# EAGLE board HPLEDShield-v32 (EAGLE 5.11)
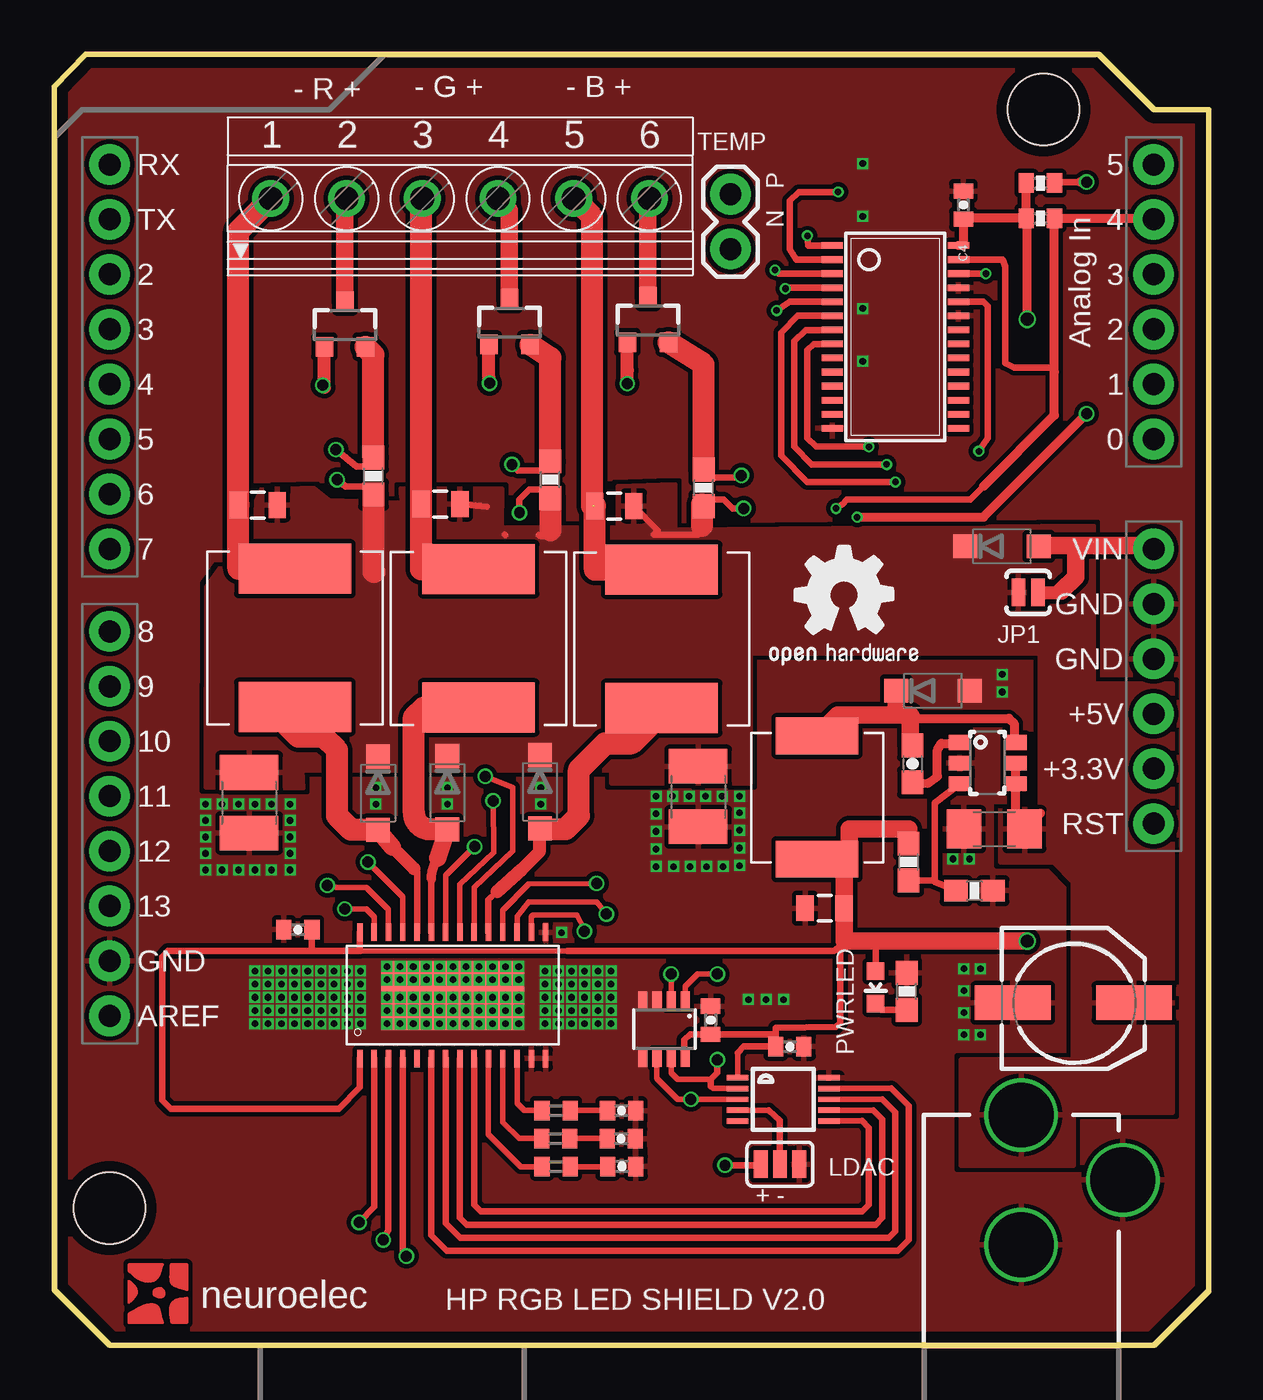
[diagram p0: board, top side]
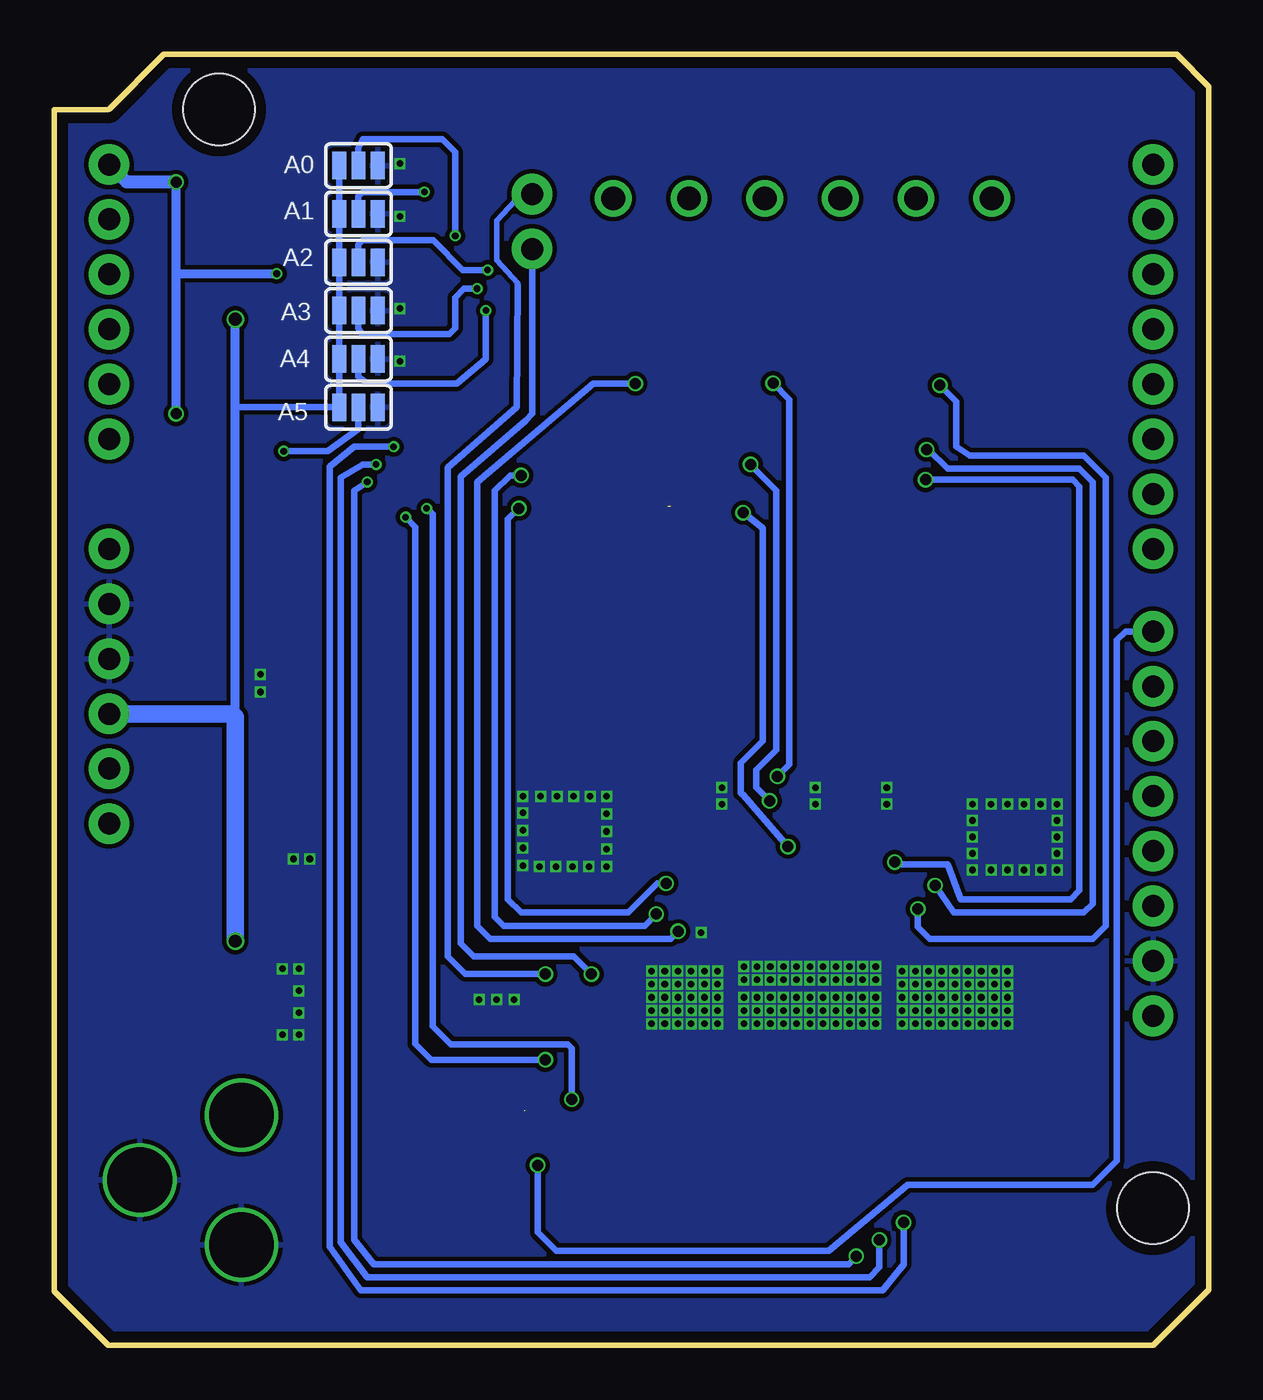
[diagram p1: board, bottom side, seen from below]

Size 53.37 x 59.72 mm. Coordinates in mm from the lower left corner, seen from the top.
Outline: 50.9,57.15 53.37,57.15 53.37,2.52 50.85,0 2.57,0 0,2.56 0,58.22 1.47,59.71 48.29,59.71 50.83,57.17
Copper layers (1*16): Top 0.035mm / dielectric 1.5mm / Bottom 0.035mm
Design rules "PCBCart-.3mmHoles-.1mmAnnulars": minimum track width 8mil, minimum drill 0.3mm, track to track 8mil, track to pad 8mil, pad to pad 8mil, via to via 8mil, smd to smd 8mil, copper to edge 20mil, drill to drill 8mil, minimum pad ring 8mil, minimum via ring 4mil, stop-mask expansion 3mil, vias tented up to drill 0mil, thermal gap 8mil

## Footprints (pad centres in the part's own frame; a part is rotated, then mirrored left to right if it is on the bottom)
SJ_3 = smd 0.635 x 1.27: 1 -0.889,0; 2 0,0; 3 0.889,0
0805 = smd 0.8 x 1.2: 1 -0.9,0; 2 0.9,0
0402-CAP = smd 0.7 x 0.9: 1 -0.65,0; 2 0.65,0
C1210 = smd 1.6 x 2.7: 1 -1.4,0; 2 1.4,0
NICHICON_63 = smd 3.5 x 1.6: + 2.8,-0.2; - -2.8,-0.2
0603-CAP = smd 1.1 x 1: 1 -0.85,0; 2 0.85,0
1206 = smd 1.6 x 1.8: 1 -1.4,0; 2 1.4,0
SOD123 = smd 1.1 x 1.1: 1 -1.7,0; 2 1.7,0
POWER_JACK_PTH = drill 2.997 round: GND 0,7.7; GNDBREAK 4.7,10.7; PWR 0,13.7
SJ_2S-NO = smd 0.635 x 1.27: 1 -0.45,0; 2 0.45,0
LQH88P = smd 2.3 x 5.2: P$1 -3.21,0; P$2 3.19,0
ELL6UH = smd 1.7 x 3.8: P$1 -2.86,0; P$2 2.84,0
LED-0603 = smd 0.8 x 0.8: A 0,-0.75; C 0,0.75
SSOP28_LED = smd 0.8 x 0.25: 1 -2.921,4.298; 2 -2.921,3.637; 3 -2.921,2.977; 4 -2.921,2.317; 5 -2.921,1.656; 6 -2.921,0.996; 7 -2.921,0.335; 8 -2.927,-0.325; 9 -2.921,-0.985; 10 -2.921,-1.646; 11 -2.921,-2.306; 12 -2.921,-2.967; 13 -2.921,-3.627; 14 -2.921,-4.287; 15 2.921,-4.287; 16 2.921,-3.627; 17 2.921,-2.967; 18 2.921,-2.306; 19 2.921,-1.646; 20 2.921,-0.985; 21 2.927,-0.325; 22 2.921,0.335; 23 2.921,0.996; 24 2.921,1.656; 25 2.921,2.317; 26 2.921,2.977; 27 2.921,3.637; 28 2.921,4.298 | smd 3.2 x 6.6: 29 0,0.005
SOT-23 = smd 0.8 x 0.9: 1 -0.95,-1; 2 0.95,-1; 3 0,1.1
0603-RES = smd 1.1 x 1: 1 -0.85,0; 2 0.85,0
R0402 = smd 0.7 x 0.9: 1 -0.65,0; 2 0.65,0
0402-RES = smd 0.7 x 0.9: 1 -0.65,0; 2 0.65,0
1X02 = drill 1.016 pad 1.88 round: 1 0,0; 2 2.54,0
DUEMILANOVE_SHIELD = drill 1.016 pad 1.88 round: 3.3V 50.8,26.67; 5V 50.8,29.21; A0 50.8,41.91; A1 50.8,44.45; A2 50.8,46.99; A3 50.8,49.53; A4 50.8,52.07; A5 50.8,54.61; AREF 2.54,15.24; D2 2.54,49.53; D3 2.54,46.99; D4 2.54,44.45; D5 2.54,41.91; D6 2.54,39.37; D7 2.54,36.83; D8 2.54,33.02; D9 2.54,30.48; D10 2.54,27.94; D11 2.54,25.4; D12 2.54,22.86; D13 2.54,20.32; GND@0 50.8,31.75; GND@1 50.8,34.29; GND@2 2.54,17.78; RES 50.8,24.13; RX 2.54,54.61; TX 2.54,52.07; VIN 50.8,36.83 | hole 3.302: 45.72,57.15; 2.54,6.35
MSOP10 = smd 1 x 0.25: 1 -2.113,1; 2 -2.113,0.5; 3 -2.113,0; 4 -2.113,-0.5; 5 -2.113,-1; 6 2.113,-1; 7 2.113,-0.5; 8 2.113,0; 9 2.113,0.5; 10 2.113,1
SOT23-8 = smd 0.42 x 0.8: 1 -0.95,-1.55; 2 -0.3,-1.55; 3 0.35,-1.55; 4 1,-1.55; 5 1,1.15; 6 0.35,1.15; 7 -0.3,1.15; 8 -0.95,1.15
TSSOP28 = smd 0.305 x 0.991: 1 -4.225,-2.918; 2 -3.575,-2.918; 3 -2.925,-2.918; 4 -2.275,-2.918; 5 -1.625,-2.918; 6 -0.975,-2.918; 7 -0.325,-2.918; 8 0.325,-2.918; 9 0.975,-2.918; 10 1.625,-2.918; 11 2.275,-2.918; 12 2.925,-2.918; 13 3.575,-2.918; 14 4.225,-2.918; 15 4.225,2.918; 16 3.575,2.918; 17 2.925,2.918; 18 2.275,2.918; 19 1.625,2.918; 20 0.975,2.918; 21 0.325,2.918; 22 -0.325,2.918; 23 -0.975,2.918; 24 -1.625,2.918; 25 -2.275,2.918; 26 -2.925,2.918; 27 -3.575,2.918; 28 -4.225,2.918
TSOT-6 = smd 0.69 x 1: 1 -0.95,-1.3; 2 0,-1.3; 3 0.95,-1.3; 4 0.95,1.3; 5 0,1.3; 6 -0.95,1.3
1751280 = drill 1.1 pad 1.7 round: 1 -8.75,-0.1; 2 -5.25,-0.1; 3 -1.75,-0.1; 4 1.75,-0.1; 5 5.25,-0.1; 6 8.75,-0.1

## Placement (x,y rotation side)
A0  + -  [SJ_3]  39.29,54.56 0 bottom
A1  + -  [SJ_3]  39.29,52.32 0 bottom
A2  + -  [SJ_3]  39.29,50.09 0 bottom
A3  + -  [SJ_3]  39.29,47.85 0 bottom
A4  + -  [SJ_3]  39.29,45.62 0 bottom
A5  + -  [SJ_3]  39.29,43.38 0 bottom
C1  1uF  [0805]  25.89,38.82 180 top
C2  1uF  [0805]  17.86,38.91 180 top
C3  1uF  [0805]  9.42,38.87 180 top
C4  0.1uF 6.3V  [0402-CAP]  42.04,52.73 270 top
C5  1000PF  [0402-CAP]  26.25,8.28 180 top
C6  1000PF  [0402-CAP]  26.22,9.56 180 top
C7  1000PF  [0402-CAP]  26.23,10.86 180 top
C8  1uF 6.3V  [0402-CAP]  11.27,19.23 180 top
C10  50V 1uF  [C1210]  29.77,25.38 270 top
C11  4.7uF 63V  [NICHICON_63]  47.12,16.05 0 top
C12  0.15uF 50V  [0603-CAP]  39.68,26.89 270 top
C13  10uF 10V  [0805]  35.62,20.22 180 top
C14  1uF 50V  [1206]  43.46,23.88 0 top
C15  50V 1uF  [C1210]  9.02,25.1 270 top
C16  0.1uF 6.3V  [0402-CAP]  30.35,15.04 270 top
C20  0.1uF 6.3V  [0402-CAP]  34.01,13.82 180 top
D1  60V 1A  [SOD123]  22.46,25.6 270 top
D2  60V 1A  [SOD123]  18.17,25.56 270 top
D3  60V 1A  [SOD123]  14.97,25.54 270 top
D4  DIODE-SCHOTTKY_ 60V 1A  [SOD123]  40.63,30.28 0 top
D5  60V 1A  [SOD123]  43.82,36.96 0 top
GOLD_ORB_SM1  OSHWLOGO_GOLD_ORB_SM  [OSHW2]  32.69,30.42 0 top
J1  POWER_JACKPTH  [POWER_JACK_PTH]  44.7,-3.05 0 top
JP1  PWM3  [SJ_2S-NO]  45.03,34.82 180 top
L1  47uH 1.2A  [LQH88P]  28.08,32.68 90 top
L2  47uH 1.2A  [LQH88P]  19.62,32.71 90 top
L3  47uH 1.2A  [LQH88P]  11.13,32.73 90 top
L4  100uH 0.7A  [ELL6UH]  35.27,25.32 270 top
LDAC  + -  [SJ_3]  33.55,8.38 0 top
LED1  PWRLED  [LED-0603]  37.97,16.56 180 top
LT3496  LT3496D  [SSOP28_LED]  18.43,16.19 90 top
Q1  SI2303  [SOT-23]  27.45,47.39 0 top
Q2  SI2303  [SOT-23]  21.05,47.29 0 top
Q3  SI2303  [SOT-23]  13.45,47.18 0 top
R1  0.14  [0603-RES]  30.03,39.66 90 top
R2  0.14  [0603-RES]  22.94,40.03 90 top
R3  0.14  [0603-RES]  14.76,40.21 90 top
R5  0  [R0402]  23.2,10.87 180 top
R6  0  [R0402]  23.19,9.57 180 top
R10  0  [R0402]  23.2,8.27 180 top
R11  5.62K  [0603-RES]  39.5,22.35 270 top
R12  1.02K  [0603-RES]  42.55,21.03 180 top
R13  270  [0603-RES]  39.41,16.37 90 top
R21  1.8K  [0402-RES]  45.59,53.75 180 top
R22  1.8K  [0402-RES]  45.59,52.12 180 top
TEMP  N P  [1X02]  31.27,50.7 90 top
U1  ARDUINO_SHIELD  [DUEMILANOVE_SHIELD]  0.03,0 0 top
U$1  MCP4728  [MSOP10]  33.71,11.38 0 top
U$2  TMP421  [SOT23-8]  28.22,14.43 180 top
U$4  PCA9685  [TSSOP28]  38.89,46.63 270 top
U$7  [NLOGO]  3.28,0.86 0 top
U$11  LM2841  [TSOT-6]  43.15,26.92 270 top
X1  LED1+  [1751280]  18.77,53.14 0 top

## Library data of the parts
A0 A1-A5 C1-C8 C11-C14 C16 C20 D1-D5 J1 JP1 L1-L4 LDAC LED1 R1-R3 R11-R13 R21 R22 TEMP U1 U$11 = SparkFun
C10 C15 = rcl
GOLD_ORB_SM1 = NBitWonder
LT3496 Q1-Q3 U$1 U$2 U$4 U$7 = mylib
R5 R6 R10 = resistor
X1 = con-phoenix-350

## Nets
5V: A0.1 A1.1 A2.1 A3.1 A4.1 A5.1 C4.2 C8.1 C13.1 C16.2 C20.2 L4.P$2 LED1.A LT3496.1 LT3496.28 R11.1 R21.2 R22.2 U1.5V U$1.1 U$2.8 U$4.28
A0: A0.2 U$4.1
A1: A1.2 U$4.2
A2: A2.2 U$4.3
A3: A3.2 U$4.4
A4: A4.2 U$4.5
A5: A5.2 U$4.24
GND: A0.3 A1.3 A2.3 A3.3 A4.3 A5.3 C4.1 C5.1 C6.1 C7.1 C8.2 C10.2 C11.- C13.2 C14.1 C15.2 C16.1 C20.1 D4.2 J1.GND J1.GNDBREAK LDAC.3 LT3496.13 LT3496.14 LT3496.15 LT3496.29 R12.1 R13.2 U1.GND@0 U1.GND@1 U1.GND@2 U$1.10 U$2.3 U$2.4 U$2.5 U$4.14 U$4.23 U$4.25 U$11.2
LDAC: LDAC.2 U$1.4
N$3: LT3496.12 R5.2
N$4: LT3496.11 R6.2
N$5: LT3496.10 R10.2
N$6: C7.2 R5.1
N$7: LDAC.1 U1.D8
N$8: C6.2 R6.1
N$9: C5.2 R10.1
N$10: LT3496.8 U$1.7
N$11: TEMP.2 U$2.1
N$12: TEMP.1 U$2.2
N$14: C12.1 D4.1 L4.P$1 U$11.6
N$15: LT3496.7 U$1.8
N$16: LT3496.21 Q2.2 R2.2
N$17: LT3496.9 U$1.6
N$18: LT3496.26 Q3.2 R3.2
N$19: LT3496.27 Q3.1
N$20: LT3496.6 U$1.9
N$21: D3.2 L3.P$1 LT3496.24
N$22: C1.2 L1.P$2 X1.5
N$23: LED1.C R13.1
N$25: C12.2 U$11.1
N$32: R11.2 R12.2 U$11.3
N$34: D2.2 L2.P$1 LT3496.23
N$36: Q3.3 X1.2
N$38: D1.2 L1.P$1 LT3496.19
N$39: LT3496.20 Q2.1
N$40: C3.2 L3.P$2 X1.1
N$42: LT3496.17 Q1.2 R1.2
N$46: LT3496.16 Q1.1
N$58: C2.2 L2.P$2 X1.3
N$63: Q2.3 X1.4
N$69: Q1.3 X1.6
PVIN: C1.1 C2.1 C3.1 C10.1 C11.+ C14.2 C15.1 D1.1 D2.1 D3.1 D5.1 J1.PWR JP1.2 LT3496.18 LT3496.22 LT3496.25 R1.1 R2.1 R3.1 U$11.4 U$11.5
PWM1: LT3496.4 U$4.6
PWM2: LT3496.3 U$4.7
PWM3: LT3496.2 U$4.8
SCK: R21.1 U1.A5 U$1.2 U$2.7 U$4.26
SDA: R22.1 U1.A4 U$1.3 U$2.6 U$4.27
VIN: D5.2 JP1.1 U1.VIN

## Tracks (layer width: path | path; a pad name or v marks a point on that pad's centre or on a via)
5V  (via drill 0.6)
  Top 0.254: 23.72,18.24 14.16,18.24 14.16,18.26 14.14,18.26 | 31.59,13.53 U$1.1
  Top 0.305: 14.14,18.26 LT3496.28 | 14.16,18.24 14.15,18.23 11.92,18.23 | C8.1 11.92,18.23 | 33.36,14.43 33.36,14.69 36.14,14.73 36.33,14.92 36.33,18.51 | 33.36,14.43 C20.2 31.88,13.82 31.59,13.53 | 33.36,14.43 33.32,14.39 C16.2 29.4,14.39 29.13,14.12 29.13,13.31 U$2.8 | 37.97,18.69 LED1.A | LT3496.1 14.14,11.93 13.15,10.94 5.4,10.94 5,11.34 5,17.98 5.26,18.23 11.92,18.23 | 23.72,18.24 36.06,18.24 36.33,18.51 | 36.33,18.51 36.52,18.69 | R21.2 44.78,53.91
  Top 0.406: R22.2 R21.2 | U$4.28 42.04,50.86 C4.2 | C4.2 42.04,52.12 | C4.2 42.08,52.12 R22.2 | v44.98,47.45 44.98,52.08 R22.2
  Top 0.813: v44.98,18.69 37.97,18.69 36.52,18.69 C13.1 36.52,22.48 L4.P$2 36.75,22.48 36.75,23.88 39.5,23.88 R11.1
  Bottom 0.305: A0.1 A1.1 A2.1 A3.1 A4.1 A5.1 44.98,43.38
  Bottom 0.406: 44.98,29.06 44.98,43.38 v44.98,47.45
  Bottom 0.813: v44.98,18.69 44.98,29.06 45.14,29.21 U1.5V
A0  (via drill 0.3)
  Top 0.305: U$4.1 34.87,50.86 v34.82,51.31
  Bottom 0.305: A0.2 39.29,55.37 39.09,55.78 35.43,55.78 34.82,55.17 v34.82,51.31
A1  (via drill 0.3)
  Top 0.305: U$4.2 34.3,50.21 34.01,50.7 34.01,52.93 34.42,53.34 v36.25,53.34
  Bottom 0.305: v36.25,53.34 39.09,53.34 39.29,53.14 A1.2
A2  (via drill 0.3)
  Top 0.305: U$4.3 33.5,49.56 v33.32,49.73
  Bottom 0.305: A2.2 39.29,50.9 39.09,51.1 35.84,51.1 34.47,49.73 v33.32,49.73
A3  (via drill 0.3)
  Top 0.305: U$4.4 33.81,48.91 v33.81,48.87
  Bottom 0.305: A3.2 39.29,47.04 39.12,46.76 35.1,46.76 34.82,47.04 34.82,48.46 34.42,48.87 v33.81,48.87
A4  (via drill 0.3)
  Top 0.305: U$4.5 34.01,48.26 v33.4,47.85
  Bottom 0.305: A4.2 39.29,44.81 38.84,44.48 34.75,44.48 33.4,45.62 v33.4,47.85
A5  (via drill 0.3)
  Top 0.305: U$4.24 42.95,48.26 43.15,48.06 43.15,41.96 v42.75,41.35
  Bottom 0.305: v42.75,41.35 40.72,41.35 39.29,42.37 A5.2
GND  (via drill 0.3)
  other vias: 7,24.27 7,23.51 7,22.75 10.91,24.27 10.91,23.51 10.91,22.75 7,21.99 10.91,21.99 7.76,21.99 8.53,21.99 9.29,21.99 10.05,21.99 10.91,25.04 7,25.04 7.76,25.04 8.53,25.04 9.29,25.04 10.05,25.04 27.83,25.39 28.59,25.39 29.35,25.39 30.12,25.39 30.88,25.39 31.69,25.39 30.93,22.14 30.17,22.14 29.4,22.14 28.64,22.14 31.69,24.63 14.88,25.8 14.88,25.04 18.18,25.8 18.18,25.04 22.5,25.8 22.5,25.04 42.82,17.42 42.05,17.42 42.05,16.4 42.05,15.38 42.05,14.37 42.82,14.37 41.55,22.5 42.31,22.5 31.69,23.82 31.69,23 31.69,22.19 27.83,24.58 27.83,23.77 27.83,22.95 27.83,22.14 23.46,19.09 32.1,15.99 32.91,15.99 33.72,15.99 43.83,31.03 43.83,30.22 37.38,45.51 37.38,47.95 37.38,54.65 37.38,52.21 15.38,17.52 15.99,17.52 16.6,17.52 17.21,17.52 17.82,17.52 18.43,17.52 19.04,17.52 19.65,17.52 20.26,17.52 20.87,17.52 21.48,17.52 15.38,16.91 15.99,16.91 16.6,16.91 17.21,16.91 17.82,16.91 18.43,16.91 19.04,16.91 19.65,16.91 20.26,16.91 20.87,16.91 21.48,16.91 9.29,16.1 9.9,16.1 10.51,16.1 11.12,16.1 11.73,16.1 12.34,16.1 12.94,16.1 13.55,16.1 14.16,16.1 9.29,15.49 9.9,15.49 10.51,15.49 11.12,15.49 11.73,15.49 12.34,15.49 12.94,15.49 13.55,15.49 14.16,15.49 9.29,17.31 9.9,17.31 10.51,17.31 11.12,17.31 11.73,17.31 12.34,17.31 12.94,17.31 13.55,17.31 14.16,17.31 9.29,16.7 9.9,16.7 10.51,16.7 11.12,16.7 11.73,16.7 12.34,16.7 12.94,16.7 13.55,16.7 14.16,16.7 9.29,14.88 9.9,14.88 10.51,14.88 11.12,14.88 11.73,14.88 12.34,14.88 12.94,14.88 13.55,14.88 14.16,14.88 15.38,14.88 15.99,14.88 16.6,14.88 17.21,14.88 17.82,14.88 18.43,14.88 19.04,14.88 19.65,14.88 20.26,14.88 20.87,14.88 21.48,14.88 15.38,16.1 15.99,16.1 16.6,16.1 17.21,16.1 17.82,16.1 18.43,16.1 19.04,16.1 19.65,16.1 20.26,16.1 20.87,16.1 21.48,16.1 15.38,15.49 15.99,15.49 16.6,15.49 17.21,15.49 17.82,15.49 18.43,15.49 19.04,15.49 19.65,15.49 20.26,15.49 20.87,15.49 21.48,15.49 22.7,16.1 23.31,16.1 23.92,16.1 24.53,16.1 25.14,16.1 25.75,16.1 22.7,15.49 23.31,15.49 23.92,15.49 24.53,15.49 25.14,15.49 25.75,15.49 22.7,17.31 23.31,17.31 23.92,17.31 24.53,17.31 25.14,17.31 25.75,17.31 22.7,16.7 23.31,16.7 23.92,16.7 24.53,16.7 25.14,16.7 25.75,16.7 22.7,14.88 23.31,14.88 23.92,14.88 24.53,14.88 25.14,14.88 25.75,14.88
  pour Top (rank 2): -1.96,61.37 -3.78,61.37 -3.78,-2.03 56.87,-2.03 56.87,61.37 -1.65,61.37
  pour Bottom: 56.26,62.59 -3.18,62.59 -3.18,-4.47 56.26,-4.47
LDAC  (1 unrouted)
  Top 0.254: 33.05,10.87 31.64,10.87
  Top 0.305: 33.05,10.87 33.55,10.41 LDAC.2
N$3
  Top 0.254: LT3496.12 21.4,11.19 21.72,10.87 R5.2
N$4
  Top 0.254: 22.43,9.55 22.45,9.57 | LT3496.11 20.74,10.32 21.49,9.57 R6.2
  Top 0.305: R6.2 22.51,9.55 22.43,9.55
N$5
  Top 0.254: LT3496.10 20.08,9.77 21.58,8.27 R10.2
N$6
  Top 0.254: R5.1 25.54,10.87 C7.2
N$7  (via drill 0.51)
  Top 0.305: LDAC.1 32.61,8.33 v31.01,8.33
  Bottom 0.305: U1.D8 3.84,33.02 4.24,32.61 4.24,8.53 5.36,7.42 13.89,7.42 17.55,4.37 30.15,4.37 31.01,5.23 v31.01,8.33
N$8
  Top 0.254: R6.1 25.54,9.57 C6.2
N$9
  Top 0.254: R10.1 25.55,8.27 C5.2
N$10
  Top 0.254: 37.86,10.88 U$1.7
  Top 0.305: LT3496.8 18.76,5.9 19.08,5.59 37.97,5.59 38.28,5.89 38.28,10.46 37.86,10.88
N$11  (via drill 0.51)
  Top 0.254: U$2.1 29.17,16.6 29.74,17.17 v30.66,17.17
  Bottom 0.254: TEMP.2 31.78,53.24 32.89,52.02 32.89,50.19 31.93,49.12 31.93,49.02
  Bottom 0.305: 31.93,49.02 31.98,43.38 35.18,40.59 35.18,17.98 34.37,17.17 v30.66,17.17
N$12  (via drill 0.51)
  Top 0.254: U$2.2 v28.52,17.17
  Bottom 0.305: TEMP.1 31.27,43.08 31.57,42.77 34.57,40.18 34.57,18.59 33.96,17.98 29.34,17.98 v28.52,17.17
N$14
  Top 0.406: 39.65,28.99 44.13,28.99 44.37,28.75 44.37,27.95 U$11.6 | C12.1 39.62,27.74 39.57,27.79
  Top 0.813: 39.57,29.15 39.65,28.99 | 39.57,29.15 39.57,27.79 | 39.22,29.15 39.57,29.15 | D4.1 38.93,29.43 39.22,29.15 | L4.P$1 36.23,29.15 39.22,29.15
N$15
  Top 0.254: 38.28,11.38 U$1.8
  Top 0.305: LT3496.7 18.1,5.65 18.77,4.98 38.58,4.98 38.89,5.28 38.89,10.77 38.28,11.38
N$16  (via drill 0.51, 0.51 pad 0.25)
  Top 0.254: LT3496.21 18.76,21.31 20.32,22.8 v20.29,25.19
  Top 0.305: v21.17,40.74 21.44,40.46 22.6,40.46 22.63,40.55 R2.2
  Top 0.813: 22.02,46.27 Q2.2
  Top 1.016: 22.02,46.27 22.94,45.66 R2.2
  Bottom 0.305: v20.29,25.19 20.9,25.8 20.9,26.62 19.99,27.53 19.99,39.52 21.17,40.7 v21.17,40.74
N$17
  Top 0.254: 37.35,10.38 U$1.6
  Top 0.305: LT3496.9 19.42,6.5 19.72,6.2 37.36,6.2 37.67,6.5 37.67,10.06 37.35,10.38
N$18  (via drill 0.51, 0.51 pad 0.25)
  Top 0.254: LT3496.26 15.46,20.16 14.43,21.19 13.43,21.19 13.04,21.17 v12.64,21.27
  Top 0.305: R3.2 14.34,40.64 14,40.64 v13.03,41.42
  Top 1.016: Q3.2 14.76,45.81 R3.2
  Bottom 0.305: v12.64,21.27 11.79,20.02 5.77,20.02 5.36,20.42 5.36,39.93 5.97,40.54 12.07,40.54 12.95,41.42 v13.03,41.42
N$19  (via drill 0.51, 0.51 pad 0.25)
  Top 0.254: LT3496.27 14.8,19.82 14.43,20.19 v13.43,20.19
  Top 0.305: 12.5,44.31 12.5,44.32 v12.42,44.4
  Top 0.61: 12.5,44.31 Q3.1
  Bottom 0.305: v13.43,20.19 13.43,19.35 12.88,18.8 5.36,18.8 4.75,19.41 4.75,40.13 5.77,41.15 11.05,41.15 11.66,41.55 11.66,43.64 v12.42,44.4
N$20
  Top 0.254: 38.69,11.88 U$1.9
  Top 0.305: LT3496.6 17.44,5.09 18.16,4.37 38.99,4.37 39.5,4.88 39.5,11.07 38.69,11.88
N$21
  Top 0.305: LT3496.24 16.78,21.91 16.64,22.05
  Top 0.61: 16.64,22.05 15.63,23.06
  Top 0.813: 15.63,23.06 D3.2
  Top 1.016: D3.2 13.73,23.84 13.08,24.49 13.08,27.53 12.47,28.14 11.3,28.14 10.24,29.21
  Top 1.27: 9.63,29.67 10.08,29.21 10.24,29.21 10.82,29.21 L3.P$1
N$22  (1 unrouted)
  Top 1.016: L1.P$2 24.99,35.87 C1.2 | 24.87,38.82 24.87,52.19 X1.5
N$23
  Top 0.305: LED1.C 38.26,15.52 R13.1
N$25
  Top 0.406: U$11.1 41.82,27.84 41.02,27.84 40.83,27.53 40.83,26.31 40.39,25.99 C12.2
N$32
  Top 0.305: U$11.3 40.72,25.09 40.72,21.5 | R12.2 40.72,21.44 40.72,21.5 | 40.72,21.5 R11.2
N$34
  Top 0.305: LT3496.23 17.44,21.55
  Top 0.406: 17.44,21.55 arc-34 17.74,22.53
  Top 0.813: 17.74,22.53 D2.2
  Top 1.016: L2.P$1 17.08,29.5 16.64,29.06 16.64,24.62 arc90 17.39,23.86 D2.2
N$36
  Top 0.813: X1.2 13.45,52.96 Q3.3
N$38
  Top 0.305: LT3496.19 20.08,20.59 20.47,20.98
  Top 0.61: 20.47,20.98 21.63,22.03 22.45,22.84 D1.2
  Top 1.016: D1.2 22.49,23.88 23.65,23.88 24.26,24.49 24.26,26.62 25.48,27.84 26.7,27.84 28.08,29.23 L1.P$1
N$39  (via drill 0.51, 0.51 pad 0.25)
  Top 0.254: LT3496.20 19.42,21.17 21.21,22.86 21.21,25.81 v19.93,26.31
  Top 0.61: Q2.1 20.1,44.77 v20.13,44.49
  Bottom 0.254: v20.13,44.49 20.13,44.44
  Bottom 0.305: v19.93,26.31 19.38,26.86 19.38,43.74 v20.13,44.49
N$40
  Top 1.016: L3.P$2 8.52,35.92 C3.2 8.52,51.53 X1.1
N$42  (via drill 0.51, 0.51 pad 0.25)
  Top 0.254: LT3496.17 21.4,19.85 21.95,20.5 25.08,20.5 v25.53,19.95
  Top 0.305: R1.2 30.4,40.13 31.67,40.13 v31.78,40.23
  Top 1.016: Q1.2 30.03,45.37 R1.2
  Bottom 0.305: v25.53,19.95 26.07,19.41 32.59,19.41 32.99,19.81 32.99,39.52 32.28,40.23 v31.78,40.23
N$46  (via drill 0.51, 0.51 pad 0.25)
  Top 0.254: LT3496.16 22.06,19.81 22.16,19.91 24.16,19.91 24.52,19.26 v24.52,19.15
  Top 0.61: Q1.1 26.5,45.08 v26.5,44.48
  Bottom 0.305: v26.5,44.48 28.45,44.48 33.81,39.93 33.81,19.41 33.2,18.8 24.87,18.8 v24.52,19.15
N$58
  Top 1.016: L2.P$2 16.96,35.9 C2.2 16.96,53.04 X1.3
N$63
  Top 0.813: Q2.3 21.05,52.51 X1.4
N$69
  Top 0.813: Q1.3 27.45,53.04 X1.6
PVIN  (via drill 0.51)
  Top 0.203: LT3496.25 16.13,19.1
  Top 0.254: LT3496.18 20.74,20.11 21.94,21.34 v25.08,21.37 | LT3496.22 18.1,21.72 v19.44,23.07 | v14.5,22.35 16.12,20.74 LT3496.25
  Top 0.305: U$11.5 U$11.4 | R2.1 22.94,39.22 22.54,39.56 21.96,39.56 21.51,39.12 v21.51,38.51 | v13.08,40.03 13.49,39.73 14.5,39.73 14.5,39.01 R3.1 | C2.1 19.99,38.8 | 20.84,37.49 20.86,37.46 | 22.94,37.69 arc-90 22.4,37.46 | v31.88,38.71 31.37,38.71 30.96,39.12 30.34,39.12 R1.1 | C1.1 27.9,37.68 27.71,37.49 29.77,37.49 29.95,37.9
  Top 0.406: C14.2 45.59,24.61 44.45,24.61 U$11.5
  Top 1.016: R3.1 14.76,35.81 arc90 14.81,35.76 | 22.94,39.22 22.94,37.69 | R1.1 29.95,38.89 29.95,37.9
  Bottom 0.305: v19.44,23.07 21.51,25.44 21.62,25.54 21.62,26.92 20.6,27.94 20.6,37.8 v21.51,38.51 | v14.5,22.35 14.4,22.25 12.07,22.25 11.46,20.62 6.38,20.62 5.97,21.03 5.97,39.73 6.27,40.03 v13.08,40.03 | v31.88,38.71 32.39,38.2 32.39,20.62 31.78,20.02 26.83,20.02 25.48,21.37 v25.08,21.37
  pour Top: 48.03,37.9 28.69,37.7 28.68,39.81 26.09,39.71 26.09,37.8 20.67,37.8 20.7,39.61 16.03,39.61 16.11,38.96 12.69,39.06 11.99,39.65 10.78,39.61 9.63,39.62 8.5,37.08 7.05,35.07 7.04,25.82 11.5,25.78 11.46,26.62 25.78,26.62 25.78,26.01 32.18,26.01 32.18,32.02 45.59,32.02 45.59,24.79 43.76,24.79 43.76,22.35 46.2,22.35 47.12,21.44 47.12,13.21 41.94,13.21 41.94,8.33 47.12,8.33 47.12,10.77 51.69,10.77 51.69,30.58 48.03,30.58
PWM1  (via drill 0.3, 0.51)
  Top 0.305: LT3496.4 16.12,4.3 v16.29,4.13 | U$4.6 34.38,47.61 33.6,46.84 33.6,41.15 34.82,39.93 v38.89,39.93
  Bottom 0.305: v16.29,4.13 16.29,4.11 16.64,3.76 38.58,3.76 39.5,4.88 39.5,39.52 v38.89,39.93
PWM2  (via drill 0.3, 0.51)
  Top 0.305: LT3496.3 15.46,5.32 v15.21,4.88 | U$4.7 34.74,46.96 34.21,46.43 34.21,41.55 35.03,40.74 v38.48,40.74
  Bottom 0.305: v15.21,4.88 15.21,3.61 15.67,3.15 38.89,3.15 40.11,4.78 40.11,40.13 39.09,40.74 v38.48,40.74
PWM3  (via drill 0.3, 0.51)
  Top 0.305: 14.81,13.27 LT3496.2 14.81,13.25 14.81,6.4 v14.1,5.69 | U$4.8 35.11,46.31 34.82,46.02 34.82,41.96 35.23,41.55 v37.67,41.55
  Bottom 0.305: v14.1,5.69 14.1,3.76 15.06,2.54 39.19,2.54 40.61,4.57 40.61,40.64 39.5,41.55 v37.67,41.55
SCK  (via drill 0.3, 0.51)
  Top 0.254: 30.35,11.99 30.46,11.88 U$1.2 | U$2.7 arc-90 U$2.7 28.52,12.6 28.83,12.29 30.35,12.29
  Top 0.305: 47.42,53.8 46.24,53.8 R21.1 | 30.35,11.99 30.35,12.29 30.66,12.6 v30.66,13.21 | v43.07,49.56 U$4.26
  Top 0.406: v37.12,38.3 42.95,38.3 v47.73,43.08 | v47.73,53.8 47.42,53.8
  Bottom 0.305: v30.66,13.21 35.94,13.21 36.67,13.94 36.67,37.85 v37.12,38.3 | v47.73,53.8 47.78,53.34
  Bottom 0.406: v47.73,43.08 47.73,49.68 | 47.73,49.68 v47.73,53.8 | v43.07,49.56 47.6,49.56 47.73,49.68
  Bottom 0.61: v47.73,53.8 50.01,53.8 U1.A5
SDA  (via drill 0.3, 0.51)
  Top 0.254: U$2.6 27.87,12.34 28.83,11.38 v29.44,11.38 U$1.3
  Top 0.305: v36.14,38.71 36.45,38.91 36.65,39.12 42.34,39.12 42.95,39.73 | U$4.27 43.85,50.21 43.97,49.89 43.97,45.41 44.37,45.21 46.04,45.21 46.24,45.01
  Top 0.406: 42.95,39.73 46.24,43.02 46.24,45.01 R22.1 50.77,52.12 U1.A4
  Bottom 0.305: v29.44,11.38 29.44,13.73 29.63,13.92 35.03,13.92 35.87,14.76 35.87,38.43 v36.14,38.71
VIN
  Top 0.406: 50.67,36.98 U1.VIN
  Top 0.61: 46.55,34.87 46.55,34.82 JP1.1
  Top 0.813: 47.22,36.98 45.77,36.98 arc90 D5.2 | 47.22,36.98 50.67,36.98 | 46.55,34.87 47.22,35.54 47.22,36.98

## Text on the board
tPlace: - R + | - G + | - B + | neuroelec | HP RGB LED SHIELD V2.0